# EAGLE board MotorController (EAGLE 7.2.0)
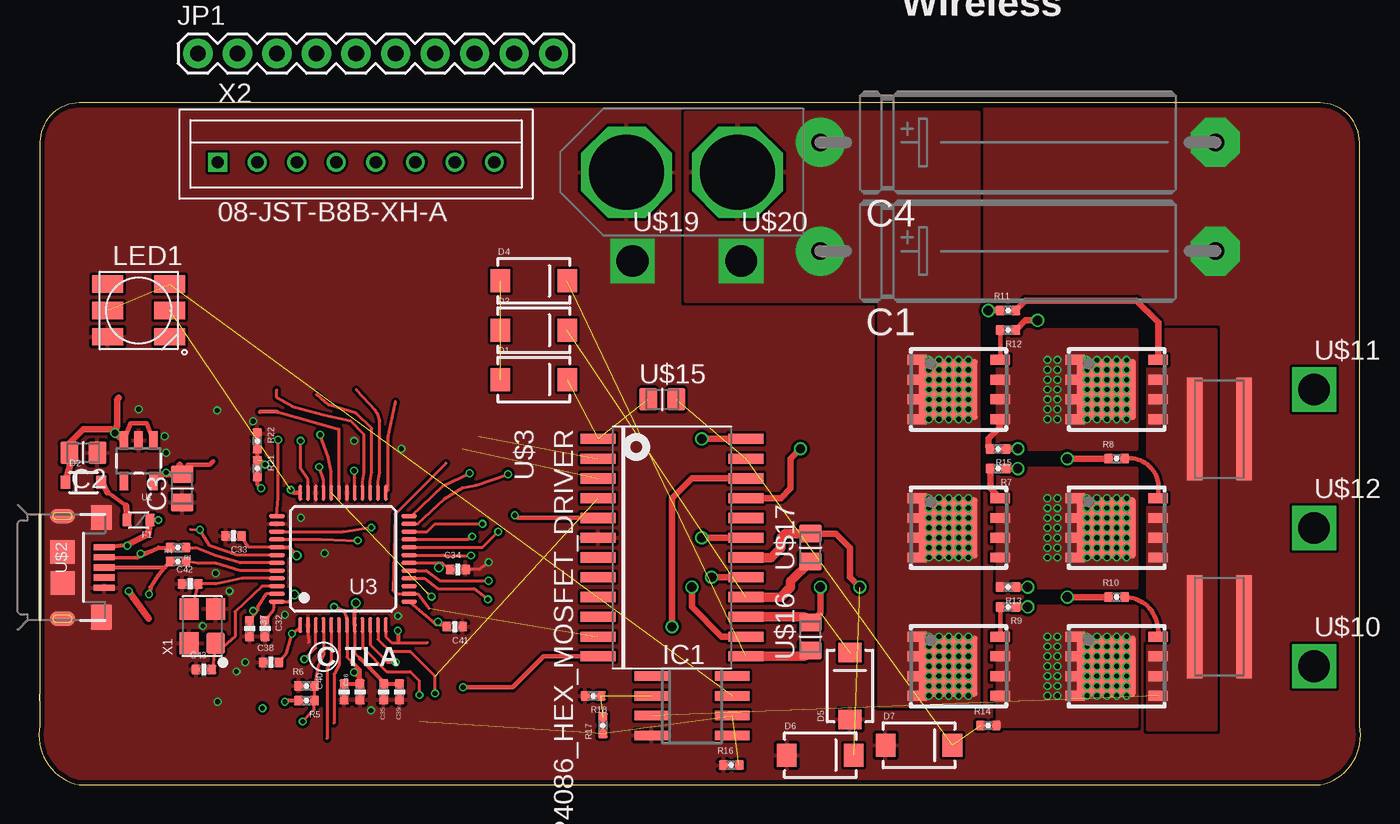
[diagram p0: board, top side]
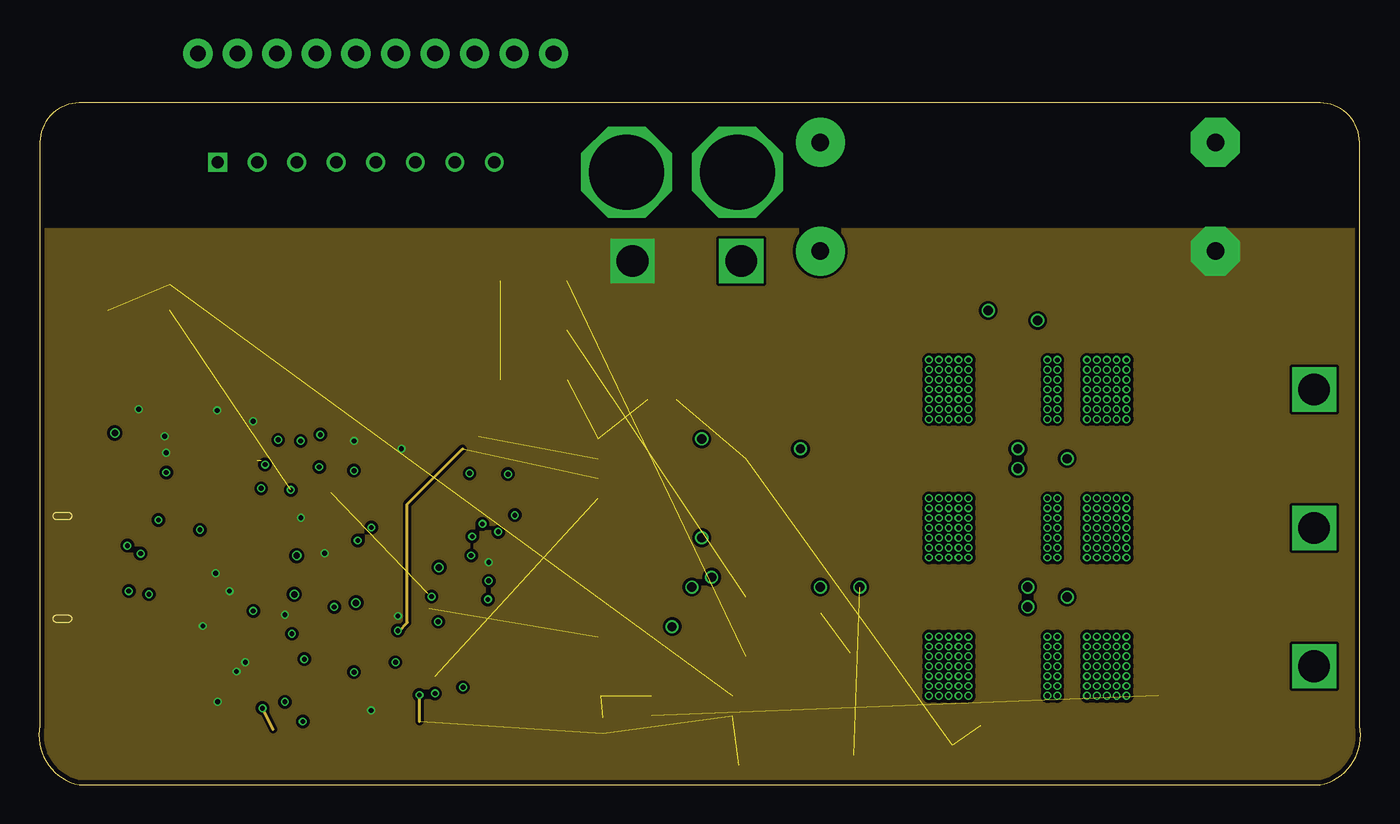
[diagram p1: board, inner layer Route2]
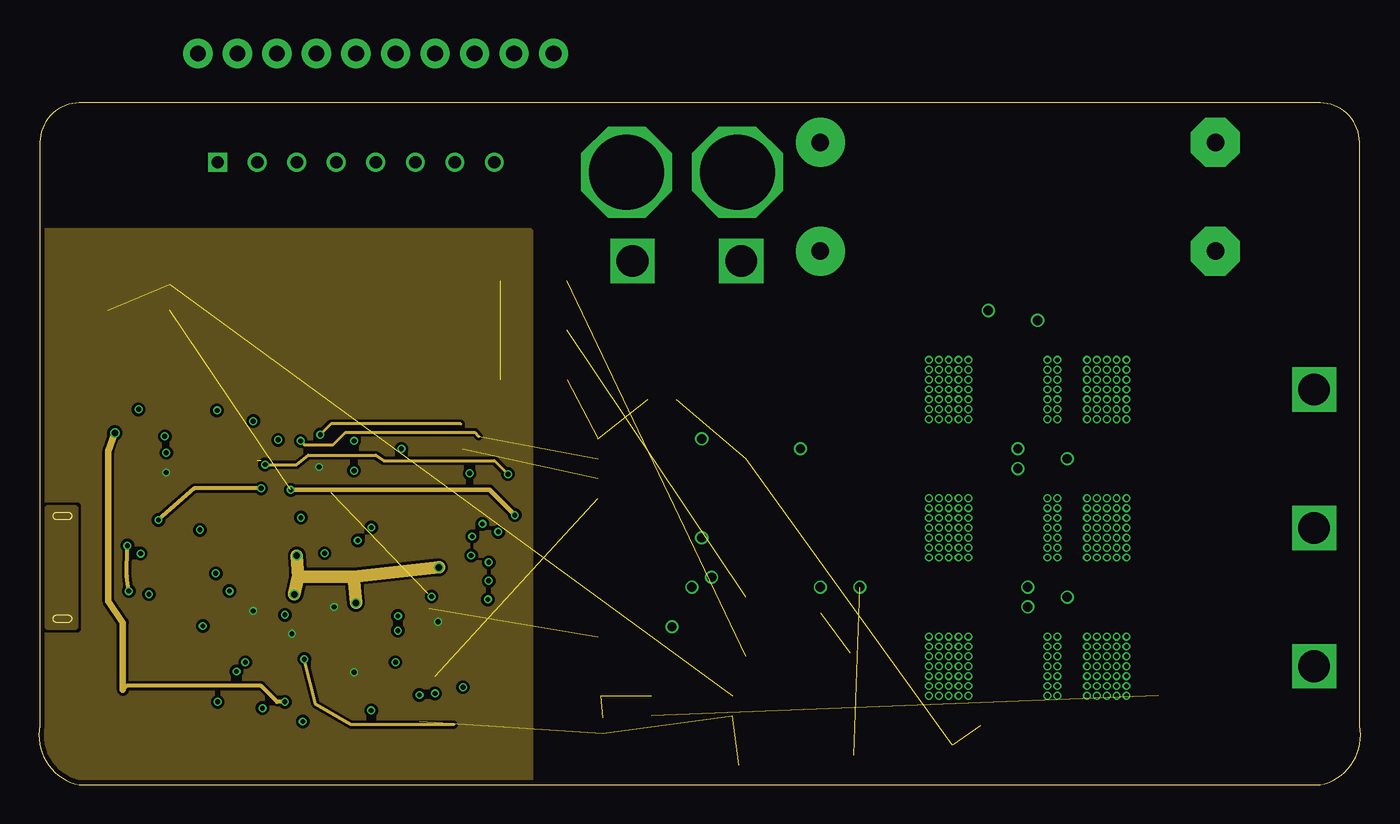
[diagram p2: board, inner layer Route15]
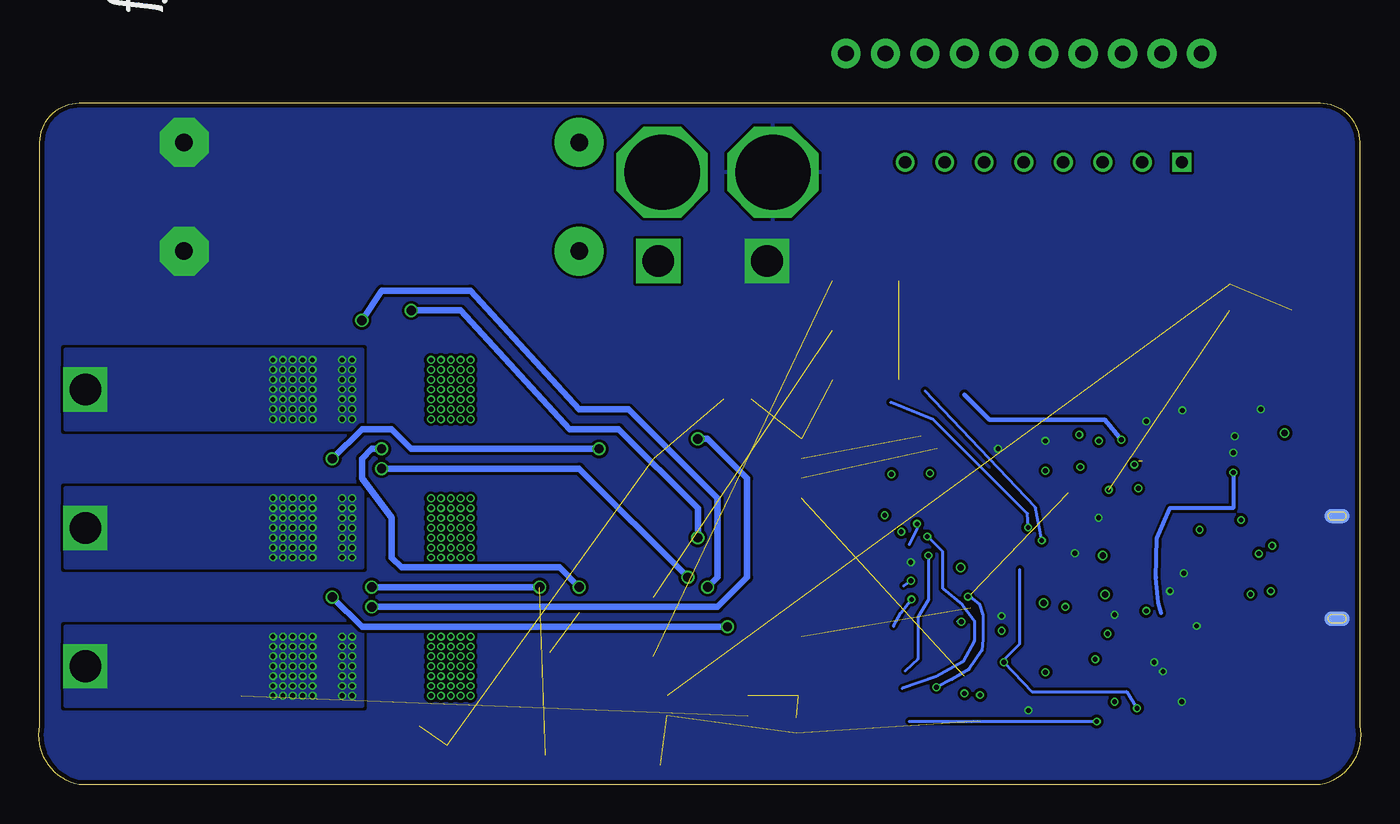
[diagram p3: board, bottom side, seen from below]

Size 84.96 x 43.81 mm. Coordinates in mm from the lower left corner, seen from the top.
Outline: 2.6,0 82.36,0 arc90 84.9,3.81 84.9,41.27 arc90 82.36,43.81 2.6,43.81 arc90 0.06,41.27 0.06,3.81 arc90 2.6,0
Copper layers (1*2+15*16): Top 0.035mm / dielectric 0.4mm / Route2 0.035mm / dielectric 0.3mm / Route15 0.035mm / dielectric 0.4mm / Bottom 0.035mm
Design rules "Flutter": minimum track width 7mil, minimum drill 12mil, track to track 7mil, track to pad 7mil, pad to pad 7mil, via to via 7mil, smd to smd 0mil, copper to edge 12mil, drill to drill 8mil, minimum pad ring 8mil, minimum via ring 4mil, stop-mask expansion 4mil, vias tented up to drill 25mil, thermal gap 8mil
Net classes: 0 default: width 0.152 mm, drill 0.152 mm, clearance 0.102 mm; 1 Power: width 0.203 mm, drill 0.152 mm, clearance 0.102 mm

## Footprints (pad centres in the part's own frame; a part is rotated, then mirrored left to right if it is on the bottom)
CAP-6.5X18MM = drill 1.118 pad 3.15: + -12.7,0 | drill 1.118 pad 3.15 octagon: - 12.7,0
0808-CAP = smd 1.15 x 1.45: 1 -0.9,0; 2 0.9,0
0402-CAP = smd 0.6 x 0.6: 1 -0.5,0; 2 0.5,0
SMA-DIODE = smd 1.27 x 1.47: A -2.15,0; C 2.15,0
SOD-323 = smd 0.63 x 0.83: 1 -1.15,0; 2 1.15,0
0603-PTC = smd 0.6 x 0.8: 1 -0.74,0; 2 0.74,0
SO08 = smd 0.6 x 2.2: 1 -1.905,-2.6; 2 -0.635,-2.6; 3 0.635,-2.6; 4 1.905,-2.6; 5 1.905,2.6; 6 0.635,2.6; 7 -0.635,2.6; 8 -1.905,2.6
1X10 = drill 1.016 pad 1.88: 1 0,0; 2 2.54,0; 3 5.08,0; 4 7.62,0; 5 10.16,0; 6 12.7,0; 7 15.24,0; 8 17.78,0; 9 20.32,0; 10 22.86,0
WS2812 = smd 2 x 1.1: DI 2,0; DO 2,-1.7; LEDVDD -2,0; NC -2,1.7; VDD 2,1.7; VSS -2,-1.7
0402-RES = smd 0.6 x 0.6: 1 -0.5,0; 2 0.5,0
OHMITE_FCSL64_CURRENT_SENSE_RESISTOR = smd 1 x 6.6: P$1 -1.6,0; P$2 1.6,0
SOT23-5 = smd 0.55 x 1.2: 1 -0.95,-1.3; 2 0,-1.3; 3 0.95,-1.3; 4 0.95,1.3; 5 -0.95,1.3
LQFP48 = smd 0.25 x 1: 1 -2.75,-4.25; 2 -2.25,-4.25; 3 -1.75,-4.25; 4 -1.25,-4.25; 5 -0.75,-4.25; 6 -0.25,-4.25; 7 0.25,-4.25; 8 0.75,-4.25; 9 1.25,-4.25; 10 1.75,-4.25; 11 2.25,-4.25; 12 2.75,-4.25; 25 2.75,4.25; 26 2.25,4.25; 27 1.75,4.25; 28 1.25,4.25; 29 0.75,4.25; 30 0.25,4.25; 31 -0.25,4.25; 32 -0.75,4.25; 33 -1.25,4.25; 34 -1.75,4.25; 35 -2.25,4.25; 36 -2.75,4.25 | smd 1 x 0.25: 13 4.25,-2.75; 14 4.25,-2.25; 15 4.25,-1.75; 16 4.25,-1.25; 17 4.25,-0.75; 18 4.25,-0.25; 19 4.25,0.25; 20 4.25,0.75; 21 4.25,1.25; 22 4.25,1.75; 23 4.25,2.25; 24 4.25,2.75; 37 -4.25,2.75; 38 -4.25,2.25; 39 -4.25,1.75; 40 -4.25,1.25; 41 -4.25,0.75; 42 -4.25,0.25; 43 -4.25,-0.25; 44 -4.25,-0.75; 45 -4.25,-1.25; 46 -4.25,-1.75; 47 -4.25,-2.25; 48 -4.25,-2.75
MICRO-USB-SLOT-2 = smd 0.4 x 1.35: D+ 0,2.7; D- -0.65,2.7; GND 1.3,2.7; ID 0.65,2.7; VBUS -1.3,2.7 | smd 1.5 x 1.55: PAD1 -1,0; PAD2 1,0.01 | smd 0.9 x 1.6: PAD3 -3.3,0; PAD4 3.3,0.01 | smd 1.6 x 1.4: PAD5 -3.2,2.5; PAD6 3.2,2.5 | smd 0.9 x 1.6 bottom: PAD7 -3.3,0; PAD8 3.3,0.01
SOIC-24 = smd 0.65 x 2.25: P$1 -6.985,-4.75; P$2 -5.715,-4.75; P$3 -4.445,-4.75; P$4 -3.175,-4.75; P$5 -1.905,-4.75; P$6 -0.635,-4.75; P$7 0.635,-4.75; P$8 1.905,-4.75; P$9 3.175,-4.75; P$10 4.445,-4.75; P$11 5.715,-4.75; P$12 6.985,-4.75; P$13 6.985,4.75; P$14 5.715,4.75; P$15 4.445,4.75; P$16 3.175,4.75; P$17 1.905,4.75; P$18 0.635,4.75; P$19 -0.635,4.75; P$20 -1.905,4.75; P$21 -3.175,4.75; P$22 -4.445,4.75; P$23 -5.715,4.75; P$24 -6.985,4.75
POWERPAK_S0-8 = smd 0.635 x 1.27: D@1 -1.905,-2.667; D@2 -0.635,-2.667; D@3 0.635,-2.667; D@4 1.905,-2.667; G -1.905,2.667; S@1 -0.635,2.667; S@2 0.635,2.667; S@3 1.905,2.667 | smd 3.912 x 3.81: DTOP 0,-0.686
HIGH_CURRENT_PAD2 = drill 2.032 pad 2.54 square: P$1 0,0
XT60_CONNECTOR = drill 4.826 pad 5.842 octagon: P$1 0,-3.556; P$2 0,3.556
XTAL_ABRACON_ABM8G_3.2MMX2.5MM = smd 1.397 x 1.194: P$1 -1.105,-0.851; P$2 1.105,-0.851; P$3 1.105,0.851; P$4 -1.105,0.851
B8B-XH = drill 0.8 square: P$1 -8.89,0 | drill 0.8: P$2 -6.35,0; P$3 -3.81,0; P$4 -1.27,0; P$5 1.27,0; P$6 3.81,0; P$7 6.35,0; P$8 8.89,0

## Placement (x,y rotation side)
C1  [CAP-6.5X18MM]  62.93,34.29 0 top
C2  4.7uF 35v 490-7208-1-ND  [0808-CAP]  2.86,21.34 180 top
C3  4.7uF 35v 490-7208-1-ND  [0808-CAP]  9.21,19.05 90 top
C4  [CAP-6.5X18MM]  62.93,41.27 0 top
C32  0.1uF  [0402-CAP]  14.54,10.03 270 top
C33  0.1uF  [0402-CAP]  12.51,16 180 top
C34  0.1uF  [0402-CAP]  26.94,13.84 0 top
C35  0.1uF  [0402-CAP]  22.16,5.97 270 top
C36  0.1uF  [0402-CAP]  20.64,5.97 90 top
C37  0.1uF  [0402-CAP]  13.54,10.03 270 top
C38  0.1uF  [0402-CAP]  14.92,7.87 0 top
C39  2.2uF  [0402-CAP]  23.18,5.97 270 top
C40  2.2uF  [0402-CAP]  19.62,5.97 270 top
C41  0.1uF  [0402-CAP]  26.74,10.16 180 top
C42  15pF  [0402-CAP]  9.72,12.92 0 top
C43  15pF  [0402-CAP]  10.6,7.41 0 top
D1  [SMA-DIODE]  31.81,26.04 0 top
D2  [SOD-323]  2.86,19.43 0 top
D3  [SMA-DIODE]  31.81,29.21 0 top
D4  [SMA-DIODE]  31.81,32.38 0 top
D5  [SMA-DIODE]  52.13,6.35 90 top
D6  [SMA-DIODE]  50.23,1.91 0 top
D7  [SMA-DIODE]  56.58,2.54 0 top
F1  500mA  [0603-PTC]  6.41,17.02 180 top
IC1  OPA333D  [SO08]  41.97,5.08 270 top
JP1  M10"  [1X10]  10.22,46.99 0 top  (outside the outline)
LED1  WS2812  [WS2812]  6.41,30.48 0 top
R1  27R  [0402-RES]  8.95,15.24 0 top
R2  [OHMITE_FCSL64_CURRENT_SENSE_RESISTOR]  75.88,10.16 180 top
R3  [OHMITE_FCSL64_CURRENT_SENSE_RESISTOR]  75.88,22.86 180 top
R4  27R  [0402-RES]  8.95,14.35 0 top
R5  6.49k  [0402-RES]  17.21,5.41 180 top
R6  1k  [0402-RES]  17.21,6.35 0 top
R7  33  [0402-RES]  61.66,20.32 180 top
R8  33  [0402-RES]  69.28,20.95 0 top
R9  33  [0402-RES]  62.29,11.43 180 top
R10  33  [0402-RES]  69.28,12.06 0 top
R11  33  [0402-RES]  62.29,30.48 0 top
R12  33  [0402-RES]  62.29,29.21 180 top
R13  4.7  [0402-RES]  62.29,12.7 180 top
R14  4.7  [0402-RES]  61.02,3.81 0 top
R15  4.7  [0402-RES]  61.66,21.59 180 top
R16  4.7  [0402-RES]  44.51,1.27 0 top
R17  4.7  [0402-RES]  36.26,3.81 90 top
R18  4.7  [0402-RES]  35.62,5.71 180 top
R21  1k  [0402-RES]  14.03,20.32 270 top
R22  2k  [0402-RES]  14.03,22.1 270 top
U1  MIC5235-3.3  [SOT23-5]  6.41,20.83 180 top
U3  SAM3S4/2/1A_48PIN_LQFP  [LQFP48]  19.55,14.51 0 top
U$1  OSHW-LOGOS  [OSHW-LOGO-S]  94.68,50.26 0 top  (outside the outline)
U$2  MICRO_USB  [MICRO-USB-SLOT-2]  1.51,13.97 270 top
U$3  HIP4086_HEX_MOSFET_DRIVER  [SOIC-24]  40.7,15.24 270 top
U$4  MOSFETSO-8  [POWERPAK_S0-8]  59.12,16.51 270 top
U$5  MOSFETSO-8  [POWERPAK_S0-8]  59.12,7.62 270 top
U$6  MOSFETSO-8  [POWERPAK_S0-8]  59.12,25.4 270 top
U$7  MOSFETSO-8  [POWERPAK_S0-8]  69.28,16.51 270 top
U$8  MOSFETSO-8  [POWERPAK_S0-8]  69.28,7.62 270 top
U$9  MOSFETSO-8  [POWERPAK_S0-8]  69.28,25.4 270 top
U$10  HIGHCURRENTPAD2  [HIGH_CURRENT_PAD2]  81.98,7.62 0 top
U$11  HIGHCURRENTPAD2  [HIGH_CURRENT_PAD2]  81.98,25.4 0 top
U$12  HIGHCURRENTPAD2  [HIGH_CURRENT_PAD2]  81.98,16.51 0 top
U$15  0.22uF  [0808-CAP]  40.07,24.77 0 top
U$16  0.22uF  [0808-CAP]  49.59,9.53 90 top
U$17  0.22uF  [0808-CAP]  49.59,15.24 90 top
U$19  HIGHCURRENTPAD2  [HIGH_CURRENT_PAD2]  38.16,33.66 0 top
U$20  HIGHCURRENTPAD2  [HIGH_CURRENT_PAD2]  45.15,33.66 0 top
U$21  XT60  [XT60_CONNECTOR]  41.34,39.37 90 top
X1  12MHz  [XTAL_ABRACON_ABM8G_3.2MMX2.5MM]  10.51,10.2 90 top
X2  08-JST-B8B-XH-A  [B8B-XH]  20.38,40.01 0 top

## Library data of the parts
C1-C4 C32-C43 F1 R1-R18 R21 R22 U3 U$2-U$12 U$15-U$17 U$19-U$21 X1 = Taylor
D1-D7 JP1 U1 U$1 = SparkFun
IC1 = linear
LED1 = adafruit
X2 = con-jst-xh

## Nets
3.3V: C3.2 C36.2 C37.1 C38.2 C40.1 C41.2 U1.5 U3.1 U3.7 U3.13 U3.33 U3.47
+1.8V [Power]: C32.1 C33.1 C34.1 C35.1 C39.1 U3.8 U3.18 U3.41 U3.48
+3V3: IC1.7 LED1.LEDVDD LED1.VDD
A: R15.2 U$6.S@1 U$6.S@2 U$6.S@3 U$9.D@1 U$9.D@2 U$9.D@3 U$9.D@4 U$9.DTOP U$11.P$1
A0/URXD1: U3.5
A1/UTXD1: U3.6
A2: IC1.6 R16.2 R17.1 U3.9
A3/PWML0: U3.11 U$3.P$4
A4: U3.3
AHO: R7.1 U$3.P$17
AHS: D6.C R13.1 U$3.P$18 U$17.2
ALO: R8.1 U$3.P$21
B: R13.2 U$4.S@1 U$4.S@2 U$4.S@3 U$7.D@1 U$7.D@2 U$7.D@3 U$7.D@4 U$7.DTOP U$12.P$1
B1/ERASE: U3.42
B2: U3.10
BHO: R9.1 U$3.P$24
BHS: D7.C R14.1 U$3.P$23 U$15.2
BLO: R10.1 U$3.P$22
C: R14.2 U$5.S@1 U$5.S@2 U$5.S@3 U$8.D@1 U$8.D@2 U$8.D@3 U$8.D@4 U$8.DTOP U$10.P$1
CHO: R12.1 U$3.P$14
CHS: D5.C R15.1 U$3.P$15 U$16.2
CLO: R11.1 U$3.P$19
D0/TWD0: U3.31
D1/TWCK0: U3.28
D2/RX0: U3.27
D3/TX0: U3.26
D4/TDI: U3.25
D5/TDO: U3.37
D6/TCK: U3.40
D7/TMS: U3.39
D8/PWMH1: U3.35 U$3.P$2
D9/PWMH2: U3.32 U$3.P$12
D10: U3.24
GND [Power]: C1.- C2.1 C3.1 C4.- C32.2 C33.2 C34.2 C35.2 C36.1 C37.2 C38.1 C39.2 C40.2 C41.1 C42.1 C43.1 D5.A D6.A D7.A IC1.4 LED1.VSS R2.P$1 R3.P$1 R6.1 R16.1 R18.2 R22.1 U1.2 U3.2 U3.30 U3.34 U3.38 U$2.GND U$2.PAD1 U$2.PAD2 U$2.PAD3 U$2.PAD4 U$2.PAD5 U$2.PAD6 U$2.PAD7 U$2.PAD8 U$3.P$6 U$19.P$1 U$21.P$2 X1.P$2 X1.P$4
N$1: D3.C U$3.P$16 U$17.1
N$2: D1.A D3.A D4.A
N$3: JP1.10
N$4: IC1.2 R17.2 R18.1
N$5: JP1.9
N$6: JP1.8
N$7: R7.2 U$4.G
N$8: R8.2 U$7.G
N$10: D2.2 F1.2
N$11: R9.2 U$5.G
N$13: R10.2 U$8.G
N$14: R11.2 U$9.G
N$15: R12.2 U$6.G
N$16: JP1.7
N$17: JP1.6
N$18: JP1.5
N$19: D1.C U$3.P$1 U$15.1
N$20: JP1.4
N$29: JP1.3
N$30: JP1.2
N$31: JP1.1
N$34: D4.C U$3.P$13 U$16.1
N$35: C42.2 U3.45 X1.P$3
N$36: C43.2 U3.46 X1.P$1
RAW [Power]: C2.2 D2.1 R5.2 U1.1 U1.3
RST: U3.29
S0/UVCCDIV: R21.1 R22.2 U3.23
S1/PWML1: U3.12 U$3.P$3
S2/PWMH0: LED1.DI U3.36 U$3.P$5
S3/PWML2: U3.14 U$3.P$11
S4: U3.15
S5/IO3: U3.20
S6/IO2: U3.21
S7/CS: U3.22
S8/SI: U3.17
S9/SO: U3.19
S10/CK: U3.16
S11/A5: R5.1 R6.2 U3.4
UDDC_+: R4.2 U3.44
UDDC_-: R1.2 U3.43
UDDM: R1.1 U$2.D-
UDDP: R4.1 U$2.D+
UVCC: F1.1 R21.2 U$2.VBUS
VMOT: C1.+ C4.+ U$4.D@1 U$4.D@2 U$4.D@3 U$4.D@4 U$4.DTOP U$5.D@1 U$5.D@2 U$5.D@3 U$5.D@4 U$5.DTOP U$6.D@1 U$6.D@2 U$6.D@3 U$6.D@4 U$6.DTOP U$20.P$1 U$21.P$1
VSENSE: IC1.3 R2.P$2 R3.P$2 U$7.S@1 U$7.S@2 U$7.S@3 U$8.S@1 U$8.S@2 U$8.S@3 U$9.S@1 U$9.S@2 U$9.S@3

## Tracks (layer width: path | path; a pad name or v marks a point on that pad's centre or on a via)
3.3V  (via drill 0.3)
  Top 0.203: U3.33 18.3,19.61 v18.02,20.42 | 20.13,7.87 19.8,8.2 U3.7 19.8,10.74 19.62,11.18 v18.99,11.43 | U3.1 16.8,10.13 v16.26,9.71 15.93,8.5 C38.2 | U3.47 14.61,12.27 14.05,11.45 14.05,11.18 | 14.05,11.18 C37.1 | 23.9,11.66 U3.13 25.49,10.3 25.58,10.27 | v13.78,11.18 14.05,11.18 | C41.2 25.58,10.27 | v25.67,10.48 25.58,10.27
  Top 0.254: C40.1 C36.2 20.64,6.86 20.64,7.37 20.13,7.87
  Top 0.305: v20.26,7.24 20.64,6.86 | 11.21,20.8 10.98,20.57 9.58,20.57 C3.2
  Top 0.406: U1.5 v8.19,20.07 8.19,19.95 C3.2 9.06,20.57
  Bottom 0.203: 25.91,10.48 v25.67,10.48
  Bottom 0.254: v8.19,20.07 8.19,17.78 12.25,17.78 13.1,15.85 13.16,13.31 13.02,11.7 12.82,11.04
  pour Route15 (rank 2, no thermals): 31.56,35.56 31.56,0 0.06,0 0.01,35.56
+1.8V  (via drill 0.41)
  Top 0.203: U3.18 25.72,14.27 | 25.72,14.27 25.93,14.27 26.22,13.97 26.43,13.97 C34.1 | U3.8 20.3,8.47 20.64,8.13 | U3.41 13.5,15.27 13.35,15.42 C33.1 | C32.1 15.05,11.18 15.13,11.77 U3.48 16.05,11.77 v16.42,12.24 | v25.72,13.97 25.72,14.27
  Top 0.254: C39.1 C35.1 22.16,6.6 20.64,8.13 | U3.41 16.09,15.27 v16.57,14.73 | U3.8 20.3,11.09 v20.38,11.68
  Route15 0.813: v16.57,14.73 16.67,13.37 | 16.67,13.37 16.57,12.95 v16.42,12.24 | v25.72,13.97 20.23,13.37 | 20.23,13.37 16.67,13.37 | v20.38,11.68 20.23,13.37
+3V3  (2 unrouted)
A  (via drill 0.3)
  Top 0.406: R15.2 61.02,21.73 61.02,22.23 61.78,22.99 U$6.S@3
  other vias: 68.64,26.67 69.28,24.77 68.64,24.13 69.28,26.67 69.91,26.67 68.01,26.67 67.37,26.67 67.37,27.3 68.01,27.3 68.64,27.3 69.28,27.3 69.91,27.3 68.01,26.04 68.64,26.04 68.64,25.4 68.01,25.4 68.01,24.77 68.64,24.77 68.01,24.13 69.28,24.13 69.28,25.4 69.28,26.04 69.91,26.04 69.91,25.4 69.91,24.77 69.91,24.13 69.91,23.5 69.28,23.5 68.64,23.5 68.01,23.5 64.83,24.77 64.83,25.4 64.83,26.04 64.83,26.67 64.83,24.13 67.37,23.5 67.37,24.13 67.37,24.77 67.37,25.4 67.37,26.04 65.47,26.67 65.47,26.04 65.47,25.4 65.47,24.77 65.47,24.13 64.83,23.5 65.47,23.5 64.83,27.3 65.47,27.3
  pour Top (no thermals): 61.66,29.21 70.55,29.21 70.55,21.59 61.66,21.59
  pour Bottom: 64.2,27.94 83.25,27.94 83.25,22.86 64.2,22.86
  pour Bottom: 64.2,27.94 83.25,27.94 83.25,22.86 64.2,22.86
A0/URXD1
  Top 0.203: U3.5 18.8,8.01 18.52,7.47 18.52,2.96
A1/UTXD1
  Top 0.203: U3.6 19.3,7.71 18.96,7.12 18.96,3.96
A2  (via drill 0.3)  (3 unrouted)
  Top 0.203: U3.9 20.8,8.83 22.36,7.27 23.86,7.27 24.46,6.67 v24.46,5.77
  Route2 0.203: 24.46,4.08 v24.46,5.77
A3/PWML0  (via drill 0.3)  (1 unrouted)
  Top 0.203: U3.11 21.8,9.33 22.56,8.57 23.86,8.57 25.46,6.97 v25.46,5.87
A4  (via drill 0.3)
  Top 0.203: v17.06,8.07 17.8,8.81 U3.3
  Route15 0.203: 26.67,3.87 20.07,3.87 17.8,5.17 v17.06,8.07
AHO  (via drill 0.6)
  Top 0.406: R7.1 v62.93,20.32 | v43.24,13.34 U$3.P$17
  Bottom 0.406: v62.93,20.32 50.23,20.32 v43.24,13.34
AHS  (via drill 0.6)  (1 unrouted)
  Top 0.406: R13.1 v63.56,12.7 | v52.77,12.7 52.13,13.34 52.13,15.24 51.23,16.14 U$17.2
  Top 0.61: U$17.2 47.95,16.14 47.69,15.88 47.69,15.24 47.05,14.61 U$3.P$18
  Bottom 0.406: v63.56,12.7 v52.77,12.7
ALO  (via drill 0.6)
  Top 0.406: R8.1 v66.1,20.95 | v48.96,21.59 48.32,20.95 48.32,19.05 47.69,18.41 U$3.P$21
  Bottom 0.406: v66.1,20.95 64.2,22.86 62.29,22.86 61.02,21.59 v48.96,21.59
B  (via drill 0.3)
  other vias: 67.37,18.41 68.01,18.41 68.64,18.41 69.28,18.41 69.91,18.41 69.91,17.78 69.28,17.78 68.64,17.78 68.01,17.78 67.37,17.78 67.37,17.14 67.37,16.51 68.01,17.14 68.01,16.51 68.01,15.88 67.37,15.88 67.37,15.24 68.01,15.24 68.64,15.24 69.28,15.24 69.91,15.24 69.91,15.88 69.91,16.51 69.91,17.14 69.28,17.14 69.28,16.51 69.28,15.88 68.64,15.88 68.64,16.51 68.64,17.14 67.37,14.61 68.01,14.61 68.64,14.61 69.28,14.61 69.91,14.61 65.47,16.51 65.47,17.14 64.83,17.14 64.83,16.51 64.83,15.88 65.47,15.88 65.47,15.24 64.83,15.24 64.83,14.61 65.47,14.61 65.47,17.78 64.83,17.78 64.83,18.41 65.47,18.41
  pour Top (no thermals): 61.66,20.32 70.55,20.32 70.55,12.7 61.66,12.7
  pour Bottom: 64.2,19.05 83.25,19.05 83.25,13.97 64.2,13.97
B1/ERASE  (via drill 0.3)
  Top 0.203: U3.42 12.73,14.77 10.98,15.37 v10.35,16.38 9.75,16.42
B2  (via drill 0.3)
  Top 0.203: U3.10 21.3,8.99 22.41,7.87 v22.92,7.87
  Top 0.254: 14.39,5.03 v14.38,4.92
  Route2 0.203: 15.05,3.56 v14.38,4.92
  Bottom 0.203: v14.38,4.92 15.04,5.99 21.14,5.99 v22.92,7.87 22.92,8.04 21.91,9.05 21.91,13.84
BHO  (via drill 0.6)
  Top 0.406: R9.1 v63.56,11.43 | v42.61,22.23 U$3.P$24
  Bottom 0.406: v63.56,11.43 41.34,11.43 39.43,13.34 39.43,19.68 41.97,22.23 v42.61,22.23
BHS  (3 unrouted)
BLO  (via drill 0.6)
  Top 0.406: R10.1 v66.1,12.06 | v40.7,10.16 40.7,18.41 41.97,19.68 U$3.P$22
  Bottom 0.406: v66.1,12.06 64.2,10.16 v40.7,10.16
C  (via drill 0.3)
  other vias: 67.37,9.53 68.01,9.53 68.64,9.53 69.28,9.53 69.91,9.53 69.91,8.89 69.91,8.26 69.91,7.62 69.91,6.99 69.91,6.35 69.91,5.71 69.28,5.71 69.28,6.35 69.28,6.99 69.28,7.62 69.28,8.26 69.28,8.89 68.64,8.89 68.01,8.89 68.01,8.26 67.37,8.26 67.37,8.89 67.37,7.62 68.01,7.62 68.64,7.62 68.64,8.26 68.64,6.99 68.01,6.99 67.37,6.99 67.37,6.35 68.01,6.35 68.64,6.35 68.64,5.71 68.01,5.71 67.37,5.71 65.47,5.71 64.83,5.71 64.83,6.35 64.83,6.99 65.47,6.35 65.47,6.99 64.83,7.62 65.47,7.62 64.83,8.26 65.47,8.26 64.83,8.89 65.47,8.89 64.83,9.53 65.47,9.53
  pour Top (no thermals): 61.66,11.43 70.55,11.43 70.55,3.81 61.66,3.81
  pour Bottom: 64.2,10.16 83.25,10.16 83.25,5.08 64.2,5.08
CHO  (via drill 0.6)
  Top 0.406: R12.1 63.43,29.84 v64.2,29.84 | v41.97,12.7 41.97,11.43 43.88,9.53 U$3.P$14
  Bottom 0.406: v64.2,29.84 62.93,31.75 57.21,31.75 50.23,24.13 47.05,24.13 41.34,18.41 41.34,13.34 v41.97,12.7
CHS  (via drill 0.6)  (1 unrouted)
  Top 0.406: R15.1 v62.93,21.59 | v50.23,12.7 50.23,11.06 U$16.2
  Top 0.61: U$16.2 49.22,10.79 U$3.P$15
  Bottom 0.406: v62.93,21.59 63.56,21.59 64.2,20.95 64.2,19.68 62.29,17.14 62.29,14.61 61.66,13.97 51.5,13.97 v50.23,12.7
CLO  (via drill 0.6)
  Top 0.406: R11.1 v61.02,30.48 | v42.61,15.88 U$3.P$19
  Bottom 0.406: v61.02,30.48 57.85,30.48 50.86,22.86 47.69,22.86 42.61,17.78 v42.61,15.88
D0/TWD0
  Top 0.203: U3.31 19.3,22.86 15.33,23.97
  Top 0.254: 15.33,23.97 14.19,23.97
D1/TWCK0
  Top 0.203: U3.28 20.8,19.47 20.89,20.07 20.89,22.5 20.07,23.35 18.3,23.76 16.38,24.28 15.29,24.88 15.29,25.38
D2/RX0
  Top 0.203: U3.27 21.3,19.46 21.4,20.07 21.4,22.91 20.38,23.86 18.62,24.41 17.84,25.09
D3/TX0
  Top 0.203: U3.26 21.8,19.45 21.91,20.07 21.91,23.36 21.74,23.88 21.62,24.08 20.4,25.4
D4/TDI
  Top 0.203: U3.25 22.46,18.93 22.46,22.37 22.92,24.63
D5/TDO  (via drill 0.3)
  Top 0.203: U3.37 15.38,18.47 v15.38,22.17
  Bottom 0.305: v15.38,22.17 16.45,23.47 23.86,23.47 25.46,25.07
D6/TCK  (via drill 0.3)
  Top 0.203: U3.40 18.17,15.77 v20.5,15.7
  Bottom 0.203: v20.5,15.7 20.9,17.82 28,25.31
D7/TMS  (via drill 0.3)
  Top 0.203: U3.39 19.56,16.27 v21.37,16.54
  Bottom 0.203: v21.37,16.54 21.42,17.42 27.46,23.47 30.21,24.57
D8/PWMH1  (via drill 0.3)  (1 unrouted)
  Top 0.203: U3.35 17.3,19.59 16.83,20.32 v16.83,22.1
  Route15 0.203: 28.28,22.39 28.02,22.64 19.7,22.64 18.9,21.84 17.08,21.84 v16.83,22.1
D9/PWMH2  (via drill 0.3)  (1 unrouted)
  Top 0.203: U3.32 18.8,20.13 18.6,21.08 v18.09,22.5 | 25.01,12.29 v25.24,12.09
  Top 0.305: v27.26,6.27 30.46,6.27 32.45,8.26 U$3.P$12
  Route15 0.203: 27.12,23.2 18.78,23.2 v18.09,22.5
  Bottom 0.203: v25.24,12.09 25.12,12.1 24.49,11.59 24.27,10.89 24.27,9.35 24.34,8.65 25.17,7.42 26.26,6.77 v27.26,6.27
D10  (via drill 0.3)
  Top 0.203: U3.24 23.93,17.27 25.97,19.2 v27.69,20.01
GND  (via drill 0.3)
  Top 0.203: U3.2 17.3,9.62 17.33,9.14 | v28.92,14.29 28.3,13.84 C34.2
  other vias: 10.54,10.21 8.09,22.39 13.78,23.37 12.7,7.28 6.41,24.13 8.19,21.34 23.08,10.84 12.25,12.45 11.49,5.33 11.37,13.59 21.36,4.78 11.45,24.06 23.3,21.59 13.27,7.87 18.37,14.88 16.84,17.17 15.81,10.92 20.26,22.1
  pour Route2 (no thermals): 84.9,35.56 84.9,0 0.06,0 0.01,35.56
  pour Top (rank 2): 0.06,0 84.9,0 84.9,43.81 0.06,43.81
  pour Bottom (rank 2): 0.06,0 84.9,0 84.9,43.81 0.06,43.81
  pour Route15: 0.57,17.78 2.35,17.78 2.35,10.16 0.57,10.16
N$1  (1 unrouted)
  Top 0.61: U$3.P$16 47.69,12.06 48.32,12.7 48.32,13.07 U$17.1
N$2  (2 unrouted)
N$4  (2 unrouted)
N$7
  Top 0.305: U$4.G arc90 U$4.G
  Top 0.406: U$4.G 61.16,19.06 R7.2
N$8
  Top 0.305: U$7.G 71.94,19.42 arc90 R8.2
N$10
  Top 0.305: 5.63,17.93 4.76,18.54 4.38,18.8
  Top 0.406: F1.2 5.63,17.93 | 4.38,18.8 4.13,19.3 | 4.13,19.3 | 4.13,19.3 4.13,19.31 D2.2
N$11
  Top 0.305: U$5.G arc90 U$5.G R9.2
N$13
  Top 0.305: U$8.G 71.94,9.9 arc90 R10.2
N$14
  Top 0.305: U$9.G 71.94,28.31
  Top 0.406: R11.2 63.43,31.11 70.55,31.11 71.94,29.72 U$9.G
N$15
  Top 0.305: U$6.G arc90 61.79,27.31 R12.2
N$19  (2 unrouted)
N$34  (1 unrouted)
  Top 0.61: U$16.1 49.22,8.26 U$3.P$13
N$35
  Top 0.203: U3.45 13.07,13.27 11.62,12.95 11.37,12.92 C42.2 10,11.93 X1.P$3
N$36
  Top 0.203: U3.46 14.35,12.77 12.62,11.13 12.62,9.54 11.6,8.64 X1.P$1 11.21,7.45 C43.2
RAW  (via drill 0.3, 0.41)
  Top 0.254: R5.2 15.89,5.41 v15.81,5.33
  Top 0.305: U1.1 6.92,23.24 5.9,23.24 U1.3
  Top 0.406: D2.1 1.97,20.45 1.98,20.69 C2.2 1.96,21.96 2.86,22.86 4.63,22.86 v4.89,22.61 | v4.89,22.61 5.03,23.11 5.03,24.75 5.14,24.87 | U1.3 v4.89,22.61
  Route15 0.254: v15.81,5.33 15.3,5.33 14.29,6.35 5.64,6.35 5.4,6.1
  Route15 0.406: 5.4,6.1 5.4,10.43 4.46,11.81 4.46,21.42 v4.89,22.61
RST  (via drill 0.3)
  Top 0.203: U3.29 20.3,19.73 v20.26,20.18
S0/UVCCDIV  (via drill 0.3)  (1 unrouted)
  Top 0.203: U3.23 24.35,16.77 26.07,18.39 27.23,19.1 28.1,19.25 v30.16,19.96
  Top 0.254: R22.2 R21.1 | 14.29,20.82 v14.54,20.57
  Route15 0.203: v14.54,20.57 16.57,20.57 17.33,21.18 21.65,21.18 22.16,20.83 29.29,20.83 v30.16,19.96
S1/PWML1  (via drill 0.3)  (1 unrouted)
  Top 0.203: U3.12 22.3,9.51 22.67,9.14 23.08,9.14 24.96,9.14
  Top 0.254: v23.08,9.91 23.08,9.14
  Route2 0.203: v23.08,9.91 23.18,9.91 23.68,10.41 23.68,18.03 27.24,21.59
S2/PWMH0  (via drill 0.3)  (1 unrouted)
  Top 0.305: U3.36 16.38,18.77 v16.19,18.95 | v30.59,17.32 30.77,17.14 U$3.P$5
  Route15 0.305: v16.19,18.95 28.97,18.95 v30.59,17.32
S3/PWML2  (1 unrouted)
  Top 0.203: 25.08,11.33 24.37,12.27 U3.14 22.96,12.27 22.76,12.47 22.89,17.4 26.16,20.67
S5/IO3  (via drill 0.3)
  Top 0.203: U3.20 28.54,15.27 v29.53,16.26
S6/IO2  (via drill 0.3)
  Top 0.203: U3.21 27.45,15.77 arc45 27.81,15.91 v27.86,15.96
  Bottom 0.203: 29.45,6.19 27.31,6.95 25.58,7.9 24.83,9.27 24.83,10.54 25.59,11.56 26.84,12.6 26.86,14.99 v27.86,15.96
S7/CS  (via drill 0.3)
  Top 0.203: U3.22 24.96,16.27 25.46,16.76 v28.51,16.76
  Bottom 0.203: v28.51,16.76 28.51,16.46 29.02,15.44
S8/SI  (via drill 0.3)
  Top 0.203: U3.17 24.91,13.77 25.76,13.11 v28.91,13.11
  Bottom 0.203: v28.91,13.11 29.37,12.78
S9/SO  (via drill 0.3)
  Top 0.203: U3.19 26,14.77 26.22,14.73 v27.79,14.73
  Bottom 0.203: v27.79,14.73 27.79,11.88 28.46,10.75 28.46,8.07 29.26,7.32
S10/CK  (via drill 0.3)
  Top 0.203: U3.16 24.77,13.27 25.64,12.6 28,12.6 v28.86,11.91
  Bottom 0.203: 30.03,10.18 29.55,11.05 v28.86,11.91
S11/A5  (via drill 0.3)
  Top 0.203: U3.4 18.3,8.35 17.95,7.64 17.74,6.56 R6.2 R5.1 17.71,4.85 v16.96,4.07
  Bottom 0.203: 29.01,4.07 v16.96,4.07
UDDC_+
  Top 0.203: U3.44 12.94,13.77 11.37,14.22 10.22,14.22 R4.2
UDDC_-
  Top 0.203: U3.43 12.93,14.27 11.37,14.73 10.09,15.24 R1.2
UDDM  (via drill 0.3)
  Top 0.203: v6.54,14.86 7.69,15.24
  Top 0.254: R1.1 7.69,15.24 6.29,14.61 4.24,14.62 U$2.D-
UDDP  (via drill 0.3)
  Top 0.254: v7.07,12.25 7.17,12.7 7.68,13.46 R4.1 8.07,13.97 U$2.D+
UVCC  (via drill 0.3)
  Top 0.254: 4.69,15.27 5.57,15.4 v5.69,15.37 5.61,15.45 5.75,15.45 4.24,15.27 U$2.VBUS | R21.2 14.03,19.3 v14.29,19.05 | v7.68,17.02 F1.1
  Top 0.406: 5.75,15.45 7.03,16.09 F1.1 | v5.78,12.45 7.05,10.66
  Route15 0.254: v5.78,12.45 5.65,13.41 v5.69,15.37 | v14.29,19.05 9.97,19.05 v7.68,17.02
VMOT  (via drill 0.3)
  other vias: 57.21,9.53 57.85,9.53 58.48,9.53 59.12,9.53 59.75,9.53 59.75,8.89 59.75,8.26 59.75,7.62 59.75,6.99 59.75,6.35 59.75,5.71 59.12,5.71 59.12,6.35 59.12,6.99 59.12,7.62 59.12,8.26 59.12,8.89 58.48,8.89 58.48,8.26 58.48,7.62 58.48,6.99 58.48,6.35 58.48,5.71 57.85,5.71 57.21,5.71 57.21,6.35 57.85,6.35 57.85,6.99 57.85,7.62 57.85,8.26 57.85,8.89 57.21,8.89 57.21,8.26 57.21,7.62 57.21,6.99 57.21,27.3 57.85,27.3 58.48,27.3 59.12,27.3 59.75,27.3 59.75,26.67 59.75,26.04 59.75,25.4 59.75,24.77 59.75,24.13 59.75,23.5 59.12,23.5 59.12,24.13 59.12,24.77 59.12,25.4 59.12,26.04 59.12,26.67 58.48,26.67 58.48,26.04 58.48,25.4 58.48,24.77 58.48,24.13 58.48,23.5 57.85,23.5 57.21,23.5 57.21,24.13 57.85,24.13 57.85,24.77 57.85,25.4 57.85,26.04 57.85,26.67 57.21,26.67 57.21,26.04 57.21,25.4 57.21,24.77 57.21,18.41 57.85,18.41 58.48,18.41 59.12,18.41 59.75,18.41 59.75,17.78 59.75,17.14 59.75,16.51 59.75,15.88 59.75,15.24 59.75,14.61 59.12,14.61 59.12,15.24 59.12,15.88 59.12,16.51 59.12,17.14 59.12,17.78 58.48,17.78 58.48,17.14 58.48,16.51 58.48,15.88 58.48,15.24 58.48,14.61 57.85,14.61 57.21,14.61 57.21,15.24 57.85,15.24 57.85,15.88 57.85,16.51 57.85,17.14 57.85,17.78 57.21,17.78 57.21,17.14 57.21,16.51 57.21,15.88
  pour Top: 60.39,43.18 60.39,5.08 54.04,5.08 54.04,31.11 41.59,31.11 41.59,43.18
VSENSE  (1 unrouted)
  pour Top: 75.63,29.21 71.31,29.21 71.31,3.56 75.63,3.56

## Text on the board
tPlace: Flutter | Wireless | OSHW | C TLA
tNames: Released under the Creative Commons Attribution Share-Alike 4.0 License / http://creativecommons.org/licenses/by-sa/4.0/ / Designed by: Taylor Alexander of Flutter Wireless, Inc.